# EAGLE board Arduino-Smart-Car-Parking-System (EAGLE 9.7.0)

Size 356.83 x 238.63 mm. Coordinates in mm from the lower left corner, seen from the top.
Outline: 0,0 356.83,0 356.83,238.63 0,238.63 0,0
Copper layers (1*16): Top 0.035mm / dielectric 1.5mm / Bottom 0.035mm
Design rules "default": minimum track width 6mil, minimum drill 0.35mm, track to track 6mil, track to pad 6mil, pad to pad 6mil, via to via 6mil, smd to smd 6mil, copper to edge 40mil, drill to drill 6mil, minimum pad ring 10mil, minimum via ring 8mil, stop-mask expansion 4mil, vias tented up to drill 0mil, thermal gap 10mil

## Footprints (pad centres in the part's own frame; a part is rotated, then mirrored left to right if it is on the bottom)
28027 = drill 1.016 long: 1 -2.54,0; 2 0,0; 3 2.54,0
SG90 = drill 1.016 long: 1 -2.54,0; 2 0,0; 3 2.54,0
ARDUINO-UNO-R3-SHIELD = drill 1.016 pad 1.88: 3.3V 24.13,-2.54; 5V 24.13,0; A0 24.13,12.7; A1 24.13,15.24; A2 24.13,17.78; A3 24.13,20.32; A4 24.13,22.86; A5 24.13,25.4; AREF -24.13,-13.97; D2 -24.13,20.32; D3 -24.13,17.78; D4 -24.13,15.24; D5 -24.13,12.7; D6 -24.13,10.16; D7 -24.13,7.62; D8 -24.13,3.81; D9 -24.13,1.27; D10 -24.13,-1.27; D11 -24.13,-3.81; D12 -24.13,-6.35; D13 -24.13,-8.89; GND@0 24.13,2.54; GND@1 24.13,5.08; GND@2 -24.13,-11.43; IOREF 24.13,-7.62; NC 24.13,-10.16; RES 24.13,-5.08; RX -24.13,25.4; SCL -24.13,-19.05; SDA -24.13,-16.51; TX -24.13,22.86; VIN 24.13,7.62
LCD-I2C = drill 1.016 long: 1 -19.05,-5.08; 2 -19.05,-7.62; 3 -19.05,-10.16; 4 -19.05,-12.7

## Placement (x,y rotation side)
PIR1  PIR-SENSOR_28027  [28027]  20.95,153.05 0 top
PIR2  PIR-SENSOR_28027  [28027]  193.92,154.99 0 top
PIR4  PIR-SENSOR_28027  [28027]  347.93,197.44 270 top
PIR5  PIR-SENSOR_28027  [28027]  349.54,132.03 270 top
PIR6  PIR-SENSOR_28027  [28027]  350.48,65.42 270 top
SERVO1  SERVOSG90  [SG90]  109.73,130.73 180 top
U1  ARDUINO-UNO-R3-SHIELD  [ARDUINO-UNO-R3-SHIELD]  110.31,47.88 0 top
U2  LCD-16X2-I2CSUNFOUNDER-IIC  [LCD-I2C]  102.62,231.09 0 top

## Library data of the parts
PIR1 PIR2 PIR4-PIR6 SERVO1 U1 U2 = Tinkercad

## Nets
U1_5V: PIR1.2 PIR2.2 PIR4.2 PIR5.2 PIR6.2 SERVO1.2 U1.5V U2.2
U1_D3: PIR2.1 U1.D3
U1_D4: PIR4.1 U1.D4
U1_D7: PIR1.1 U1.D7
U1_D8: SERVO1.3 U1.D8
U1_D12: PIR5.1 U1.D12
U1_D13: PIR6.1 U1.D13
U1_GND: PIR1.3 PIR2.3 PIR4.3 PIR5.3 PIR6.3 SERVO1.1 U1.GND@0 U1.GND@1 U1.GND@2 U2.1
U1_SCL: U1.SCL U2.4
U1_SDA: U1.SDA U2.3

## Tracks (layer width: path | path; a pad name or v marks a point on that pad's centre or on a via)
U1_5V  (7 unrouted)
U1_D3  (1 unrouted)
U1_D4  (1 unrouted)
U1_D7  (1 unrouted)
U1_D8  (1 unrouted)
U1_D12  (1 unrouted)
U1_D13  (1 unrouted)
U1_GND  (9 unrouted)
U1_SCL  (1 unrouted)
U1_SDA  (1 unrouted)